# EAGLE board Brave Albar-Duup (EAGLE 9.7.0)

Size 263.36 x 111.93 mm. Coordinates in mm from the lower left corner, seen from the top.
Outline: 0,0 263.36,0 263.36,111.93 0,111.93 0,0
Copper layers (1*16): Top 0.035mm / dielectric 1.5mm / Bottom 0.035mm
Design rules "default": minimum track width 6mil, minimum drill 0.35mm, track to track 6mil, track to pad 6mil, pad to pad 6mil, via to via 6mil, smd to smd 6mil, copper to edge 40mil, drill to drill 6mil, minimum pad ring 10mil, minimum via ring 8mil, stop-mask expansion 4mil, vias tented up to drill 0mil, thermal gap 10mil

## Footprints (pad centres in the part's own frame; a part is rotated, then mirrored left to right if it is on the bottom)
BATTERY-GENERIC = drill 1.118 pad 3.15 octagon: + 2.54,0; - -2.54,0
LEDRD254W60D565H860B = drill 0.981 pad 1.581: 1 -1.27,0; 2 1.27,0
MOTOR = drill 1.118 pad 3.15 octagon: + 2.54,0; - -2.54,0
GL5528 = drill 0.8 pad 1.4: 1 -1.702,0; 2 1.702,0
RESAD1016W63L850D250B = drill 0.83 pad 1.43: 1 -5.08,0; 2 5.08,0
HA-06-SM065 = drill 1 pad 1.676: 1 -2.54,-2.54; 2 0,2.54; 3 2.54,-2.54
SEN-13322 = drill 1.016 long: 1 -2.54,0; 2 0,0; 3 2.54,0
TO92 = drill 0.813 octagon: 1 -1.27,0; 2 0,1.905; 3 1.27,0
ARDUINO-UNO-R3-SHIELD = drill 1.016 pad 1.88: 3.3V 24.13,-2.54; 5V 24.13,0; A0 24.13,12.7; A1 24.13,15.24; A2 24.13,17.78; A3 24.13,20.32; A4 24.13,22.86; A5 24.13,25.4; AREF -24.13,-13.97; D2 -24.13,20.32; D3 -24.13,17.78; D4 -24.13,15.24; D5 -24.13,12.7; D6 -24.13,10.16; D7 -24.13,7.62; D8 -24.13,3.81; D9 -24.13,1.27; D10 -24.13,-1.27; D11 -24.13,-3.81; D12 -24.13,-6.35; D13 -24.13,-8.89; GND@0 24.13,2.54; GND@1 24.13,5.08; GND@2 -24.13,-11.43; IOREF 24.13,-7.62; NC 24.13,-10.16; RES 24.13,-5.08; RX -24.13,25.4; SCL -24.13,-19.05; SDA -24.13,-16.51; TX -24.13,22.86; VIN 24.13,7.62
JHD-162A = drill 1.016 long: 1 -19.05,0; 2 -16.51,0; 3 -13.97,0; 4 -11.43,0; 5 -8.89,0; 6 -6.35,0; 7 -3.81,0; 8 -1.27,0; 9 1.27,0; 10 3.81,0; 11 6.35,0; 12 8.89,0; 13 11.43,0; 14 13.97,0; 15 16.51,0; 16 19.05,0

## Placement (x,y rotation side)
BAT1  9V  [BATTERY-GENERIC]  105.2,103.67 90 top
D1  RED  [LEDRD254W60D565H860B]  205.36,99.69 180 top
M1  MOTOR_HDR  [MOTOR]  226.95,99.69 0 top
M2  MOTOR_HDR  [MOTOR]  191.39,79.38 0 top
R1  PHOTOCELL_GL5528  [GL5528]  167.26,81.92 0 top
R2  10k  [RESAD1016W63L850D250B]  168.53,69.22 90 top
R3  1k  [RESAD1016W63L850D250B]  49.78,54.38 90 top
RPOT1  250k  [HA-06-SM065]  77.72,41.68 180 top
SEN1  SEN-13322  [SEN-13322]  256.37,104.02 0 top
T1  NPN  [TO92]  160.91,99.69 0 top
T2  NPN  [TO92]  214.25,81.92 0 top
U1  ARDUINO-UNO-R3-SHIELD  [ARDUINO-UNO-R3-SHIELD]  190.12,29.84 270 top
U2  TMP36GT9Z_TO92  [TO92]  173.61,99.69 0 top
U4  LCD-16X2JHD-162A  [JHD-162A]  30.73,39.27 0 top

## Library data of the parts
BAT1 M1 M2 R1-R3 RPOT1 SEN1 U1 U2 U4 = Tinkercad
D1 = Tinkercad; CATEGORY: Opto-Electronic; SUB-CATEGORY: LED; VALUE: LED_RED
T1 T2 = Tinkercad; CATEGORY: Transistor; SUB-CATEGORY: BJT; TYPE: NPN

## Nets
BAT1+: BAT1.+ M1.+ M2.+
BAT1-: BAT1.- D1.2 R2.1 R3.2 RPOT1.3 SEN1.2 T1.3 T2.3 U1.GND@0 U1.GND@1 U1.GND@2 U2.1 U4.1 U4.5
M1_-: M1.- T2.1
M2_-: M2.- T1.1
U1_5V: R1.1 RPOT1.1 SEN1.1 U1.5V U2.3 U4.2 U4.15
U1_A0: SEN1.3 U1.A0
U1_A1: R1.2 R2.2 U1.A1
U1_A2: U1.A2 U2.2
U1_D2: U1.D2 U4.14
U1_D3: U1.D3 U4.13
U1_D4: U1.D4 U4.12
U1_D5: U1.D5 U4.11
U1_D6: D1.1 U1.D6
U1_D8: T2.2 U1.D8
U1_D9: T1.2 U1.D9
U1_D11: U1.D11 U4.6
U1_D12: U1.D12 U4.4
U4_LED-: R3.1 U4.16
U4_VO: RPOT1.2 U4.3

## Tracks (layer width: path | path; a pad name or v marks a point on that pad's centre or on a via)
BAT1+  (2 unrouted)
BAT1-  (13 unrouted)
M1_-  (1 unrouted)
M2_-  (1 unrouted)
U1_5V  (6 unrouted)
U1_A0  (1 unrouted)
U1_A1  (2 unrouted)
U1_A2  (1 unrouted)
U1_D2  (1 unrouted)
U1_D3  (1 unrouted)
U1_D4  (1 unrouted)
U1_D5  (1 unrouted)
U1_D6  (1 unrouted)
U1_D8  (1 unrouted)
U1_D9  (1 unrouted)
U1_D11  (1 unrouted)
U1_D12  (1 unrouted)
U4_LED-  (1 unrouted)
U4_VO  (1 unrouted)